# Altium PCB nema17-knockout.PcbDoc (part 2 of 3)
Units mm, origin at the board's own origin, x right, y up, seen from the top; angles counter-clockwise.
Board outline 42.3 x 42.32 mm, 2 copper layers (Top, Bottom), stack 0 mm thick; 130 components, 82 nets, 394 pads, 273 vias.
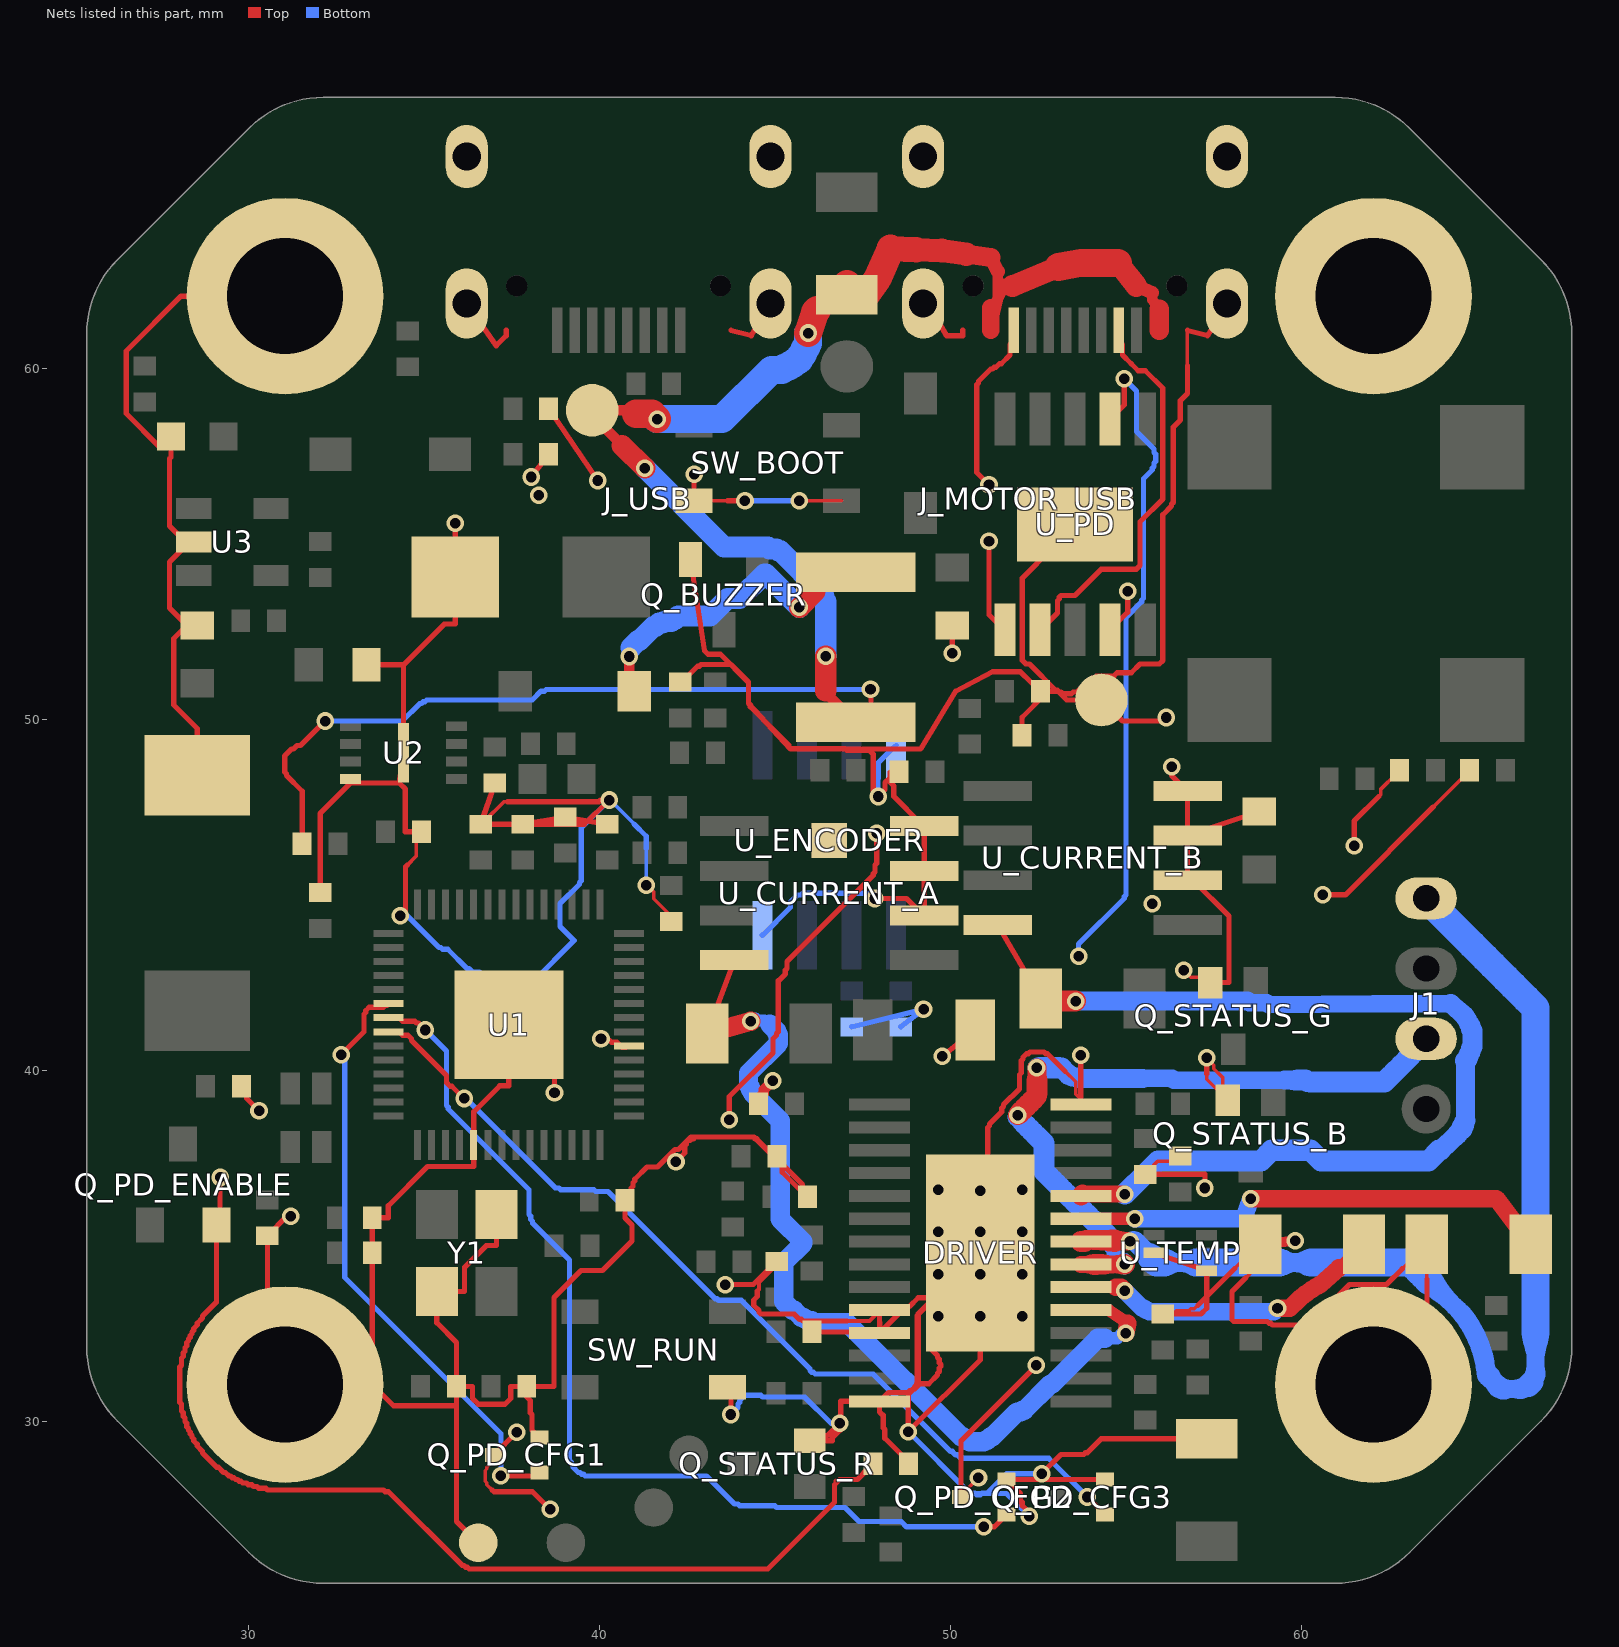
[diagram p2: the nets of this part, all layers, seen from the top]

## Via types
v1: diameter 0.5, hole 0.3, Top to Bottom, 267 vias
v2: diameter 0.45, hole 0.3, Top to Bottom, 6 vias

## Nets (pads, with @x,y where several pads share a name; then routed paths per layer and width w, separated by ;. In a path a pad name is that pad's centre, name@x,y a point inside that pad or via, vN(x,y) a via of type N, cw(c..) or ccw(c..) an arc to the next point about the centre after c; other vN are vias at no path point) (continued)
GND: C_3V3.2 C_ADC.2 C_ADC_A.2 C_ADC_B.2 C_BUZZER.2 C_CORE.2 C_CURRENT_A.2 C_CURRENT_B.2 C_DRV_3V3.2 C_DRV_REF.2 C_DVDD1.2 C_DVDD2.2 C_ENCODER.2 C_ENCODER_BULK.2 C_FLASH.2 C_IOVDD1.2 C_IOVDD2.2 C_IOVDD3.2 C_IOVDD4.2 C_IOVDD5.2 C_IOVDD6.2 C_MOTOR_BULK.2 C_PD_VBUS.2 C_PD_VDD.2 C_TEMP.2 C_USB.2 C_USB_VDD.2 C_VBUS.2 C_VM_BULK.2 C_VM_HF.2 C_VMA.2 C_XIN.2 C_XOUT.2 D_MOTOR_TVS.2 D_PWR.1 DRIVER.14 DRIVER.24 DRIVER.25 DRIVER.28 DRIVER.29 J_MOTOR_USB.1 J_MOTOR_USB.2 J_MOTOR_USB.3 J_MOTOR_USB.4 J_MOTOR_USB.5 J_MOTOR_USB.16 J_USB.13 J_USB.14 J_USB.15 J_USB.16 J_USB.17 J_USB.28 MH1.1 MH2.1 MH3.1 MH4.1 Q_BUZZER.2 Q_PD_CFG1.2 Q_PD_CFG2.2 Q_PD_CFG3.2 Q_STATUS_B.1 Q_STATUS_G.1 Q_STATUS_R.1 R_BUZZER_PD.2 R_CC1.2 R_CC2.2 R_DRV_REF_BOTTOM.2 R_ISEN_A.2 R_ISEN_B.2 R_MCU_ENABLE_PD.2 R_SLEEP_PD.2 SW_BOOT.3 SW_RUN.4 TP_GND.1 TP_PD_GND.1 U1.19 U1.57 U2.4 U2.9 U3.2 U_CURRENT_A.2 U_CURRENT_A.3 U_CURRENT_A.4 U_CURRENT_B.2 U_CURRENT_B.3 U_CURRENT_B.4 U_ENCODER.4 U_ENCODER.8 U_PD.11 U_TEMP.2 U_TEMP.4 Y1.2 Y1.4 | length 555.5
  Top w0.1: v1(41.34,45.28) 41.45,45.2 41.55,45.1 41.55,44.9 42.05,44.4 C_CURRENT_A.2@42.05,44.25 ; SW_BOOT.3@42.7,56.235 43.65,56.235 ; v1@45.85,56.235 46.9,56.235 ; R_BUZZER_PD.2@48.29,48.51 R_BUZZER_PD.2@48.54,48.51 ; DRIVER.29@50.85,34.81 50.966,34.885 DRIVER.29@50.966,35.785 ; U_PD.11@52.9,54.886 53.45,55.436 U_PD.11@53.55,55.56 ; 53.266,39.985 53.566,39.685 53.566,39.335 53.716,39.185 DRIVER.14@53.716,39.035 ; C_VM_HF.2@55.55,37.05 55.65,37.17 55.9,37.42 56.25,37.42 56.4,37.57 C_TEMP.2@56.55,37.57 ; C_VMA.2@56.05,33.07 56.35,33.07 56.45,33.17 56.8,33.17 56.85,33.22 56.95,33.22 57.05,33.32 ; v1(56.65,42.86) 56.85,42.66 57.1,42.66 57.25,42.51 Q_STATUS_G.1@57.4,42.51 ; 56.75,60.086 56.75,61.086 ; 57.3,39.91 57.3,39.76 Q_STATUS_B.1@57.9,39.16 57.9,39.31 57.75,39.46 57.75,39.81 57.5,40.06 57.5,40.16 57.35,40.31 v1(57.3,40.37) ; 58.1,34.37 58.7,34.97 R_ISEN_A.2@58.821,35.06 58.821,34.91 58.671,34.76 58.671,34.36 58.421,34.11 ; MH3.1@62.05,31.06 62.171,31.16 MH3.1@62.721,31.71 ; 62.871,34.36 R_ISEN_B.2@63.571,35.06 63.571,34.06
  Top w0.107: 34.535,45.86 34.785,46.11 34.785,46.51 34.935,46.66 C_IOVDD2.2@34.935,46.81 ; C_DVDD1.2@36.625,47.02 36.735,47.11 37.285,47.66 37.385,47.66 ; 44.5,33.72 44.55,33.77 44.55,33.97 45.05,34.47 R_DRV_REF_BOTTOM.2@45.05,34.57 ; 47.05,32.87 47.7,32.87 47.9,33.07 DRIVER.24@47.984,33.185
  Top w0.15: D_PWR.1@27.801,58.06 27.801,57.473 ; U3.2@28.45,55.06 U3.2@28.278,55.002 ; C_IOVDD3.2@29.81,39.56 29.81,39.41 29.96,39.26 29.96,39.21 v1(30.31,38.86) ; MH2.1@31.05,62.06 28.09,62.06 26.528,60.498 26.528,58.718 27.479,57.767 27.801,57.767 27.801,57.473 ; v1(31.21,35.86) 31.11,35.86 C_IOVDD5.2@30.55,35.3 ; C_IOVDD6.2@32.05,45.07 32.05,47.326 U2.4@32.917,48.193 ; C_3V3.2@33.375,51.56 34.425,51.56 ; v1(34.335,44.41) 34.485,44.56 34.485,45.81 34.535,45.86 ; C_IOVDD2.2@34.935,46.81 34.478,46.81 34.478,48.019 34.304,48.193 ; D_MOTOR_TVS.2@35.9,54.06 35.9,52.723 ; v1(35.9,55.59) 35.9,52.723 ; J_USB.14@36.225,61.854 37.062,60.648 37.35,60.935 37.35,61.086 ; TP_GND.1@36.55,26.56 36.435,26.66 35.935,27.16 C_XIN.2@35.935,31.01 ; C_FLASH.2@37.025,48.2 C_DVDD1.2@36.625,47.02 ; 37.385,47.66 39.985,47.66 40.035,47.71 v1(40.285,47.71) 39.575,47.02 C_DVDD1.2@36.625,47.02 ; v1(38.06,56.91) R_CC1.2@38.56,57.56 ; Q_PD_CFG1.2@38.3,29.56 38.185,29.66 38.085,29.76 38.085,30.21 38.035,30.26 38.035,30.61 37.935,30.71 C_XOUT.2@37.935,31.01 37.478,31.01 ; R_CC2.2@38.56,58.86 v1(39.96,56.81) ; v1(38.725,39.37) 38.725,40.02 37.525,41.22 U1.57@37.425,41.31 37.425,39.573 37.168,39.573 36.425,38.83 U1.19@36.425,37.885 36.425,37.273 35.112,37.273 33.992,36.153 33.992,35.81 C_IOVDD1.2@33.535,35.81 ; C_USB.2@40.225,47.02 C_CORE.2@39.025,47.22 C_USB_VDD.2@37.825,47.02 C_DVDD1.2@36.625,47.02 ; v1(42.185,37.41) 42.435,37.66 42.435,37.86 42.485,37.91 42.485,37.96 42.535,38.01 42.585,38.01 42.635,38.06 42.685,38.06 42.735,38.11 44.385,38.11 44.435,38.06 44.485,38.06 45.785,36.76 45.785,36.71 45.935,36.56 C_ADC.2@45.935,36.41 45.81,36.51 45.21,37.11 45.21,37.26 45.06,37.41 C_DRV_REF.2@45.06,37.56 44.96,37.56 44.41,38.11 42.61,38.11 42.26,37.76 42.16,37.76 41.66,37.26 41.36,37.26 41.01,36.91 41.01,36.86 40.96,36.81 40.96,36.71 40.91,36.66 40.91,36.51 40.81,36.41 C_DVDD2.2@40.735,36.31 40.735,35.803 40.932,35.607 40.932,35.155 40.091,34.314 39.484,34.314 38.713,33.543 38.713,31.01 37.478,31.01 ; C_ADC_A.2@42.3,51.07 42.35,51.07 42.8,51.52 42.85,51.52 42.9,51.57 43.75,51.57 44.25,51.07 44.25,50.47 44.3,50.42 44.3,50.37 45.4,49.27 45.4,49.22 45.45,49.17 47,49.17 47.05,49.12 47.7,49.12 47.8,49.02 47.8,47.97 v1(47.94,47.81) 48.14,48.01 48.14,48.21 48.29,48.36 48.29,48.51 48.29,48.21 48.39,48.11 48.39,47.81 49.14,47.06 U_CURRENT_A.4@49.255,46.965 U_CURRENT_A.3@49.255,45.695 U_CURRENT_A.2@49.255,44.425 49.145,44.505 48.745,44.905 v1(47.845,44.905) ; Q_BUZZER.2@42.6,54.56 43,51.96 43.1,51.86 43.45,51.86 44.25,51.06 44.25,50.46 45.45,49.16 49.15,49.16 50.15,50.81 51.2,51.36 52,51.36 C_ADC_B.2@52.56,50.81 ; SW_BOOT.3@42.7,56.235 v1(42.7,56.985) ; v1(43.585,33.91) 44.385,33.91 44.935,34.46 R_DRV_REF_BOTTOM.2@45.05,34.57 ; SW_RUN.4@43.65,30.985 43.75,30.91 v1(43.75,30.21) ; 43.65,56.235 v1(44.15,56.235) ; 43.75,61.086 44.325,60.935 J_USB.13@44.875,61.854 ; 44.5,33.72 44.5,33.57 44.4,33.47 44.4,33.32 44.55,33.17 44.55,33.12 44.6,33.07 45.55,33.07 45.7,32.92 45.75,32.92 45.8,32.87 47.05,32.87 ; v1(45.7,56.235) v1@45.85,56.235 ; R_SLEEP_PD.2@46.06,32.56 47.91,32.56 DRIVER.25@47.984,32.535 ; v1(46.85,29.96) 46.5,29.61 46.3,29.61 46.15,29.46 Q_STATUS_R.1@46,29.46 46.637,29.46 46.637,29.539 46.874,29.777 46.874,30.585 DRIVER.28@47.984,30.585 ; DRIVER.24@47.984,33.185 DRIVER.25@47.985,32.535 ; R_MCU_ENABLE_PD.2@48.81,28.81 48.734,28.935 48.134,29.535 48.134,29.785 48.084,29.835 48.084,30.185 47.984,30.285 DRIVER.28@47.984,30.585 ; J_MOTOR_USB.2@49.225,61.854 49.338,61.885 49.888,60.935 50.35,60.935 50.35,61.086 ; v1(49.762,40.41) C_PD_VBUS.2@50.712,41.16 ; v1(50.05,51.885) C_PD_VDD.2@50.05,52.685 ; DRIVER.29@50.966,35.785 50.966,37.035 51.066,37.135 51.066,38.385 51.116,38.435 51.116,38.485 51.466,38.835 51.466,38.935 51.516,38.985 51.516,39.035 51.966,39.485 51.966,39.885 52.016,39.935 52.016,40.285 52.066,40.335 52.066,40.385 52.166,40.485 52.216,40.485 52.266,40.535 52.666,40.535 52.716,40.485 52.766,40.485 53.266,39.985 ; C_CURRENT_B.2@52.04,49.56 52.04,50.067 52.045,50.067 52.674,50.696 C_ADC_B.2@52.56,50.81 ; v1(52.25,27.31) 52.25,27.41 52.05,27.61 52.05,27.71 52,27.71 52,27.96 51.7,28.26 Q_PD_CFG2.2@51.6,28.36 Q_PD_CFG3.2@54.4,28.36 ; v1(52.6,28.523) 53.15,29.073 53.8,29.073 53.85,29.123 53.9,29.123 54.3,29.523 C_VM_BULK.2@57.3,29.523 ; U_PD.11@52.9,54.886 52.05,54.036 52.05,51.686 52.15,51.586 52.25,51.586 53,50.836 53.05,50.836 53.1,50.786 53.15,50.786 53.2,50.736 53.45,50.736 53.5,50.786 53.6,50.786 53.95,51.136 54,51.136 54.05,51.186 54.1,51.186 54.15,51.236 54.65,51.236 54.75,51.336 55.15,51.336 55.4,51.586 55.95,51.586 56.05,51.686 56.05,55.836 56.3,56.086 56.3,56.136 56.35,56.186 56.35,58.336 56.55,58.536 56.55,59.086 56.75,59.286 56.75,60.086 ; DRIVER.14@53.716,39.035 v1(53.716,40.435) ; C_VM_HF.2@55.55,37.05 57.25,37.05 v1(57.25,36.66) ; C_VMA.2@56.05,33.07 57.132,33.07 57.3,33.238 U_TEMP.4@57.3,34.31 ; v1(56.15,50.06) 56.05,49.96 54.9,49.96 TP_PD_GND.1@54.3,50.56 53.313,50.56 53.063,50.81 C_ADC_B.2@52.56,50.81 ; v1(56.3,48.66) 56.3,48.41 56.65,48.06 U_CURRENT_B.4@56.755,47.965 U_CURRENT_B.3@56.755,46.695 ; 56.75,61.086 57.325,60.935 J_MOTOR_USB.1@57.875,61.854 ; 57.05,33.32 58.1,34.37 ; 57.3,39.91 57.3,40.31 v1(57.3,40.37) ; Q_STATUS_G.1@57.4,42.51 57.937,42.51 57.937,44.402 56.914,45.425 U_CURRENT_B.2@56.755,45.425 U_CURRENT_B.3@56.755,46.695 ; 58.421,34.11 58.021,33.71 58.021,32.91 58.071,32.86 59.021,32.86 59.071,32.81 59.121,32.81 59.171,32.76 60.221,32.76 61.371,33.91 62.421,33.91 62.871,34.36 ; C_BUZZER.2@58.8,47.385 U_CURRENT_B.3@56.755,46.695 ; MH3.1@62.721,31.71 63.571,32.56 63.571,34.06 ; 27.763,53.179 C_VBUS.2@28.257,52.685 ; 27.763,53.179 27.763,54.488 ; 27.763,53.179 27.763,54.488 ; 27.763,53.179 C_VBUS.2@28.257,52.685 ; 27.763,53.179 C_VBUS.2@28.257,52.685 ; 27.763,53.179 27.763,54.488 ; 27.763,54.488 U3.2@28.278,55.002 ; 27.763,54.488 U3.2@28.278,55.002 ; 27.763,54.488 U3.2@28.278,55.002 ; 27.763,55.517 27.763,57.436 ; 27.763,55.517 U3.2@28.278,55.002 ; 27.763,55.517 U3.2@28.278,55.002 ; 27.763,55.517 27.763,57.436 ; 27.763,57.436 27.801,57.473 ; 27.763,57.436 27.801,57.473 ; 27.883,50.416 27.883,52.312 ; 27.883,50.416 28.55,49.749 ; 27.883,50.416 27.883,52.312 ; 27.883,50.416 28.55,49.749 ; 27.883,52.312 C_VBUS.2@28.257,52.685 ; 27.883,52.312 C_VBUS.2@28.257,52.685 ; C_VBUS.2@28.257,52.685 C_VBUS.2@28.55,52.685 ; C_VBUS.2@28.257,52.685 C_VBUS.2@28.55,52.685 ; C_VBUS.2@28.257,52.685 C_VBUS.2@28.55,52.685 ; 28.55,49.749 C_MOTOR_BULK.2@28.55,48.412 28.55,49.749 ; MH1.1@30.55,31.56 C_IOVDD5.2@30.55,35.3 ; MH1.1@30.55,31.56 MH1.1@31.05,31.06 ; MH1.1@30.55,31.56 C_IOVDD5.2@30.55,35.3 ; MH1.1@30.55,31.56 MH1.1@31.05,31.06 ; MH1.1@31.05,31.06 MH1.1@33.535,31.06 ; U2.4@32.918,48.193 34.304,48.193 ; U2.4@32.918,48.193 U2.4@32.918,48.31 ; U2.4@32.917,48.193 U2.4@32.918,48.31 ; U2.4@32.918,48.193 U2.4@32.918,48.31 ; U2.4@32.918,48.193 34.304,48.193 ; MH1.1@33.535,31.06 34.137,30.458 ; MH1.1@33.535,31.06 C_IOVDD1.2@33.535,35.81 ; MH1.1@33.535,31.06 34.137,30.458 ; MH1.1@33.535,31.06 C_IOVDD4.2@33.535,34.81 ; MH1.1@33.535,31.06 C_IOVDD4.2@33.535,34.81 ; C_IOVDD4.2@33.535,34.81 C_IOVDD1.2@33.535,35.81 ; 34.137,30.458 35.935,30.458 ; 34.137,30.458 35.935,30.458 ; 34.304,48.193 U2.9@34.425,49.06 ; 34.304,48.193 U2.9@34.425,49.06 ; 34.304,48.193 U2.9@34.425,49.06 ; U2.9@34.425,49.06 34.425,51.56 ; U2.9@34.425,49.06 34.425,51.56 ; U2.9@34.425,49.06 34.425,51.56 ; 34.425,51.56 35.588,52.723 ; 34.425,51.56 35.588,52.723 ; 35.375,32.823 Y1.2@35.375,33.71 ; 35.375,32.823 35.935,32.263 ; 35.375,32.823 Y1.2@35.375,33.71 ; 35.375,32.823 35.935,32.263 ; 35.375,32.823 Y1.2@35.375,33.71 ; 35.375,32.823 35.935,32.263 ; 35.375,32.823 Y1.2@35.375,33.71 ; 35.375,32.823 35.935,32.263 ; Y1.2@35.375,33.71 36.162,33.71 ; Y1.2@35.375,33.71 36.162,33.71 ; Y1.2@35.375,33.71 36.162,33.71 ; 35.588,52.723 35.9,52.723 ; 35.588,52.723 35.9,52.723 ; 35.935,30.458 35.935,32.263 ; 35.935,30.458 35.935,32.263 ; C_XIN.2@35.935,31.01 36.392,31.01 ; C_XIN.2@35.935,31.01 35.935,32.263 ; C_XIN.2@35.935,31.01 35.935,32.263 ; C_XIN.2@35.935,31.01 36.392,31.01 ; 36.162,33.71 36.162,34.4 ; 36.162,33.71 36.162,34.4 ; 36.162,33.71 36.162,34.4 ; 36.162,34.4 36.785,35.023 ; 36.162,34.4 36.785,35.023 ; 36.162,34.4 36.785,35.023 ; 36.392,30.668 36.392,31.01 ; 36.392,30.668 36.556,30.503 ; 36.392,30.668 36.392,31.01 ; 36.392,30.668 36.556,30.503 ; 36.556,30.503 37.314,30.503 ; 36.556,30.503 37.314,30.503 ; 36.785,35.023 37.075,35.023 ; 36.785,35.023 37.075,35.023 ; 36.785,35.023 37.075,35.023 ; 37.075,35.023 Y1.4@37.075,35.91 ; 37.075,35.023 Y1.4@37.075,35.91 ; 37.075,35.023 Y1.4@37.075,35.91 ; 37.314,30.503 37.478,30.668 ; 37.314,30.503 37.478,30.668 ; 37.478,30.668 37.478,31.01 ; 37.478,30.668 37.478,31.01 ; DRIVER.28@47.984,30.585 48.235,30.835 ; DRIVER.28@47.984,30.585 48.234,30.835 ; DRIVER.25@47.984,32.535 48.735,33.285 48.835,33.285 49.085,33.535 49.335,33.535 49.385,33.485 49.385,32.135 49.635,31.885 49.635,31.835 49.685,31.785 49.685,31.685 49.735,31.635 49.735,31.585 49.685,31.535 49.685,31.435 49.635,31.385 49.635,31.335 49.385,31.085 49.135,31.085 48.985,30.935 48.935,30.935 ; 48.235,30.835 48.785,30.835 ; 48.234,30.835 48.784,30.835 ; 48.785,30.835 48.835,30.885 48.885,30.885 ; 48.784,30.835 48.834,30.885 48.884,30.885 ; 48.885,30.885 48.935,30.935 ; 48.884,30.885 48.934,30.935 ; 48.934,30.935 48.984,30.935 48.984,30.985 49.034,31.035 49.034,31.085 49.084,31.135 49.084,33.085 50.734,34.735 DRIVER.29@50.85,34.81 ; DRIVER.29@50.85,34.81 50.75,34.723 49.05,33.023 49.05,31.073 49,31.023 49,30.973 48.8,30.773 v1(48.8,29.723) 50.85,31.76 DRIVER.29@50.85,34.81 ; U_TEMP.4@57.3,34.31 U_TEMP.2@55.8,34.81 57.142,34.363 U_TEMP.4@57.3,34.31
  Top w0.3: C_DRV_3V3.2@44.54,39.06 44.54,39.21 44.69,39.36 44.69,39.46 v1(44.94,39.71) ; R_ISEN_A.2@58.821,35.06 v1(59.821,35.16)
  Mid1 w0.1: v1(56.65,42.86) 56.65,42.31 57.3,41.66 57.3,41.51
  Mid1 w0.15: v1(35.9,55.59) 37.278,55.59 v1(38.275,56.385) ; v1(42.185,37.41) 43.585,36.01 v1(43.585,33.91) ; v1(56.15,50.06) 56.15,49.96 56.3,49.81 v1(56.3,48.66) ; v1(57.3,40.37) 57.3,40.41 57.3,41.51 ; J_MOTOR_USB.1@57.875,61.854 58.45,62.46 MH4.1@62.05,62.06 ; 35.65,62.46 J_USB.14@36.225,61.854 ; 35.65,62.46 MH2.1@31.05,62.06 35.65,62.46 ; 35.65,62.46 J_USB.14@36.508,61.602 ; J_USB.14@36.225,61.854 J_USB.14@36.508,61.602 ; J_USB.14@36.225,61.854 J_USB.14@36.508,61.602 ; J_USB.14@36.225,61.854 J_USB.14@36.508,61.602 ; J_USB.14@36.508,61.602 J_USB.13@44.592,61.602 ; J_USB.14@36.508,61.602 J_USB.13@44.592,61.602 ; J_USB.14@36.508,61.602 J_USB.13@44.592,61.602 ; J_USB.14@36.508,61.602 J_USB.13@44.592,61.602 ; J_USB.13@44.592,61.602 J_USB.13@44.875,61.854 ; J_USB.13@44.592,61.602 J_USB.13@44.875,61.854 ; J_USB.13@44.592,61.602 J_USB.13@44.875,61.854 ; J_USB.13@44.592,61.602 J_USB.13@44.875,61.854 ; J_USB.15@44.875,66.034 J_MOTOR_USB.4@49.225,66.034 ; J_USB.15@44.875,66.034 J_MOTOR_USB.4@49.225,66.034 ; J_USB.15@44.875,66.034 J_MOTOR_USB.4@49.225,66.034 ; J_USB.15@44.875,66.034 J_MOTOR_USB.4@49.225,66.034 ; J_USB.15@44.875,66.034 J_MOTOR_USB.4@49.225,66.034 ; J_USB.15@44.875,66.034 J_MOTOR_USB.4@49.225,66.034 ; J_USB.15@44.875,66.034 J_MOTOR_USB.4@49.225,66.034
  Mid2 w0.15: v1(30.31,38.86) 30.31,38.61 31.21,37.71 v1(31.21,35.86) ; J_USB.16@36.225,66.034 J_USB.14@36.225,61.854 36.225,59.207 v1(38.275,56.385) ; v1(38.725,39.37) 38.925,39.57 38.925,44.07 38.975,44.12 38.975,44.17 40.025,45.22 40.025,45.42 40.075,45.47 40.075,45.57 40.275,45.77 v1(40.285,47.71) ; J_MOTOR_USB.1@57.875,61.854 J_MOTOR_USB.3@57.875,66.034 ; J_USB.13@44.875,61.854 J_USB.15@44.875,66.034 ; J_USB.13@44.875,61.854 J_USB.15@44.875,66.034 ; J_USB.13@44.875,61.854 J_USB.15@44.875,66.034 ; J_USB.13@44.875,61.854 J_USB.15@44.875,66.034 ; J_USB.13@44.875,61.854 J_USB.15@44.875,66.034 ; J_USB.13@44.875,61.854 J_USB.15@44.875,66.034 ; J_MOTOR_USB.2@49.225,61.854 J_MOTOR_USB.4@49.225,66.034 ; J_MOTOR_USB.2@49.225,61.854 J_MOTOR_USB.4@49.225,66.034 ; J_MOTOR_USB.2@49.225,61.854 J_MOTOR_USB.4@49.225,66.034 ; J_MOTOR_USB.2@49.225,61.854 J_MOTOR_USB.4@49.225,66.034 ; J_MOTOR_USB.2@49.225,61.854 J_MOTOR_USB.4@49.225,66.034 ; J_MOTOR_USB.2@49.225,61.854 J_MOTOR_USB.4@49.225,66.034
  Bottom w0.1: v1(40.285,47.71) 40.39,47.63 40.99,47.03 ; v1(41.34,45.28) 41.34,46.33
  Bottom w0.15: v1(34.335,44.41) 34.535,44.41 35.435,43.51 35.485,43.51 35.535,43.46 35.685,43.46 36.235,42.91 36.285,42.91 36.385,42.81 36.585,42.81 36.785,42.61 36.835,42.61 36.885,42.56 36.985,42.56 37.035,42.51 38.035,42.51 38.085,42.56 38.135,42.56 39.285,43.71 38.885,44.11 38.885,44.76 39.435,45.31 39.435,45.36 39.485,45.41 39.485,46.91 v1(40.285,47.71) ; 40.99,47.03 41.34,46.68 41.34,46.33 ; v1(43.75,30.21) 43.95,30.41 43.95,30.51 44,30.56 44,30.61 44.15,30.76 44.6,30.76 44.65,30.71 45.85,30.71 46.6,29.96 v1(46.85,29.96) ; v1(44.15,56.235) v1(45.7,56.235) ; U_ENCODER.4@44.645,43.855 45.445,44.655 45.445,44.805 45.645,45.005 45.745,45.005 45.795,45.055 47.695,45.055 v1(47.845,44.905) ; C_ENCODER.2@47.185,41.25 v1(49.235,41.75) C_ENCODER_BULK.2@48.585,41.25 ; v1(52.25,27.31) 51.6,27.96 50.6,27.96 50.55,28.01 50.5,28.01 v1(48.8,29.723) 50.55,27.973 50.7,27.973 50.75,27.923 50.85,27.923 50.9,27.973 51.05,27.973 51.6,28.523 v1(52.6,28.523) ; v1(47.94,47.81) 47.94,48.76 48.34,49.16 U_ENCODER.8@48.455,49.265 48.35,49.17 47.95,48.77 v1(47.94,47.81)
  other v1: 49.65,33.01 50.85,33.01 52.05,33.01 49.65,34.21 50.85,34.21 52.05,34.21 49.65,35.41 50.85,35.41 52.05,35.41 50.85,36.588 49.65,36.61 52.05,36.61
ISEN_A: DRIVER.6 R_ISEN_A.1 | length 9.1
  Top w0.3: DRIVER.6@53.716,33.835 54.716,33.835 ; 61.066,34.385 61.666,34.985 R_ISEN_A.1@61.779,35.06
  Top w0.5: 54.716,33.835 54.866,33.835 v1(54.966,33.735) ; v1(59.316,33.235) 59.664,33.237 59.916,33.485 59.945,33.51 60.11,33.643 60.143,33.667 60.258,33.747 60.293,33.77 60.411,33.843 60.449,33.865 60.508,33.898 60.548,33.919 61.066,34.385
  Bottom w0.5: v1(54.966,33.735) 55.466,33.235 55.516,33.235 55.566,33.185 55.616,33.185 55.666,33.135 59.216,33.135 v1(59.316,33.235)
ISEN_B: DRIVER.9 R_ISEN_B.1 | length 13.9
  Top w0.35: DRIVER.9@53.716,35.785 v1(55.25,35.785)
  Top w0.5: v1(58.55,36.36) 65.55,36.36 R_ISEN_B.1@66.529,35.06
  Bottom w0.5: v1(55.25,35.785) 58.35,35.785 v1(58.55,36.36)
MCU_ENABLE: Q_PD_ENABLE.2 R_MCU_ENABLE_PD.1 U1.34 | length 44.9
  Top w0.15: v1(29.2,36.96) 29.2,35.76 29.15,35.71 29.15,35.66 Q_PD_ENABLE.2@29.1,35.61 29.1,33.41 28.7,33.01 28.7,32.96 28.55,32.81 28.55,32.76 28.45,32.66 28.45,32.61 28.4,32.56 28.4,32.51 28.35,32.46 28.35,32.41 28.3,32.36 28.3,32.31 28.25,32.26 28.25,32.16 28.2,32.11 28.2,32.01 28.15,31.96 28.15,31.86 28.1,31.81 28.1,31.61 28.05,31.56 28.05,30.56 28.1,30.51 28.1,30.31 28.15,30.26 28.15,30.16 28.2,30.11 28.2,30.01 28.25,29.96 28.25,29.86 28.3,29.81 28.3,29.76 28.35,29.71 28.35,29.66 28.4,29.61 28.4,29.56 28.45,29.51 28.45,29.46 28.55,29.36 28.55,29.31 28.7,29.16 28.7,29.11 29.1,28.71 29.15,28.71 29.3,28.56 29.35,28.56 29.45,28.46 29.5,28.46 29.55,28.41 29.6,28.41 29.65,28.36 29.7,28.36 29.75,28.31 29.8,28.31 29.85,28.26 29.95,28.26 30,28.21 30.1,28.21 30.15,28.16 30.25,28.16 30.3,28.11 30.5,28.11 30.55,28.06 33.85,28.06 33.9,28.01 34,28.01 36.1,25.91 36.15,25.91 36.2,25.86 36.25,25.86 36.3,25.81 44.8,25.81 46.7,27.71 46.7,28.21 46.75,28.26 46.75,28.31 46.8,28.31 46.85,28.36 47.35,28.36 47.7,28.71 R_MCU_ENABLE_PD.1@47.79,28.81 ; v1(40.05,40.91) 40.2,40.91 40.25,40.86 40.3,40.86 40.35,40.81 40.5,40.81 40.65,40.66 40.75,40.66 U1.34@40.85,40.71
  Mid1 w0.15: v1(29.2,36.96) 29.35,37.11 29.85,37.61 29.85,39.01 29.95,39.11 29.95,39.16 30.05,39.26 30.1,39.26 30.15,39.31 35.6,39.31 35.9,39.61 35.95,39.61 36,39.66 36.4,39.66 36.55,39.81 37.55,39.81 37.6,39.86 38.1,39.86 38.25,40.01 38.3,40.01 38.35,40.06 38.4,40.06 38.45,40.11 39.1,40.11 39.4,40.41 39.8,40.81 39.9,40.81 39.95,40.86 40,40.86 v1(40.05,40.91)
MOTOR_A_MINUS: DRIVER.7 J1.2 | length 20.1
  Top w0.485: DRIVER.7@53.716,34.485 53.791,34.485 DRIVER.7@53.866,34.485
  Top w0.49: DRIVER.7@53.866,34.485 DRIVER.7@53.941,34.485
  Top w0.505: 54.616,34.485 54.691,34.485 v1@54.766,34.485
  Top w0.51: DRIVER.7@53.941,34.485 DRIVER.7@54.016,34.485 ; DRIVER.7@54.541,34.485 54.616,34.485
  Top w0.515: DRIVER.7@54.466,34.485 DRIVER.7@54.541,34.485
  Top w0.52: v1@54.766,34.485 v1@54.841,34.485
  Top w0.535: v1@52.466,40.012 v1(52.466,40.085)
  Top w0.54: v1@52.466,39.867 52.466,39.94 v1@52.466,40.012 ; DRIVER.7@54.391,34.485 DRIVER.7@54.466,34.485
  Top w0.545: v1@54.841,34.485 v1@54.916,34.485
  Top w0.55: 52.466,39.794 v1@52.466,39.867 ; DRIVER.7@54.016,34.485 DRIVER.7@54.091,34.485
  Top w0.56: v1(51.916,38.735) v1@51.966,38.785
  Top w0.565: 52.416,39.235 52.466,39.285 52.466,39.358 ; DRIVER.7@54.316,34.485 DRIVER.7@54.391,34.485
  Top w0.58: 52.466,39.722 52.466,39.794 ; DRIVER.7@54.241,34.485 DRIVER.7@54.316,34.485
  Top w0.59: DRIVER.7@54.166,34.485 DRIVER.7@54.241,34.485 ; v1@54.916,34.485 v1(54.965,34.485)
  Top w0.6: v1@51.966,38.785 52.016,38.835 52.066,38.885 52.116,38.935 52.166,38.985 52.216,39.035 52.266,39.085 52.316,39.135 52.366,39.185 52.416,39.235 ; 52.466,39.358 52.466,39.431 52.466,39.503 52.466,39.576 52.466,39.649 52.466,39.722 ; DRIVER.7@54.091,34.485 DRIVER.7@54.166,34.485
  Bottom w0.37: 54.566,34.985 54.616,34.935 54.616,34.885
  Bottom w0.38: 54.616,34.885 54.666,34.835 54.666,34.785
  Bottom w0.39: 54.566,35.048 54.566,35.11 54.566,35.173 54.566,35.235
  Bottom w0.405: 54.514,35.287 54.566,35.235 ; 54.566,34.985 54.566,35.048
  Bottom w0.435: 54.666,34.785 54.716,34.735 54.766,34.685
  Bottom w0.445: 54.766,34.685 v1@54.816,34.635
  Bottom w0.47: v1@54.816,34.635 v1@54.866,34.585
  Bottom w0.5: 55.491,39.785 55.566,39.785 55.641,39.785 55.716,39.785 55.791,39.785 55.866,39.785 55.941,39.785 56.016,39.785 56.091,39.785 56.166,39.785 56.241,39.785 56.316,39.785 56.366,39.735 56.441,39.735 56.516,39.735 56.591,39.735 56.666,39.735 56.741,39.735 56.816,39.735 56.891,39.735 56.966,39.735 57.041,39.735 57.116,39.735 57.191,39.735 57.266,39.735 57.341,39.735 57.416,39.735 57.491,39.735 57.566,39.735 57.641,39.735 57.716,39.735 57.791,39.735 57.866,39.735 57.941,39.735 58.016,39.735 58.091,39.735 58.166,39.735 58.241,39.735 58.316,39.735 58.391,39.735 58.466,39.735 58.541,39.735 58.616,39.735 58.691,39.735 58.766,39.735 58.841,39.735 58.916,39.735 58.991,39.735 59.066,39.735 59.141,39.735 59.216,39.735 59.291,39.735 59.366,39.735 59.441,39.735 59.516,39.735
  Bottom w0.515: v1@51.916,38.685 v1(51.916,38.735) ; v1@54.866,34.585 v1@54.916,34.535
  Bottom w0.525: 53.516,39.835 53.566,39.835 53.616,39.785 ; 54.462,35.339 54.514,35.287
  Bottom w0.535: 59.591,39.735 59.666,39.735
  Bottom w0.54: 53.366,39.885 53.416,39.885 53.466,39.835 ; 53.616,39.785 53.691,39.785 53.766,39.785 53.841,39.785 53.916,39.785 53.991,39.785 54.066,39.785 54.141,39.785 54.216,39.785 54.291,39.785 54.366,39.785 54.441,39.785 54.516,39.785 54.591,39.785 54.666,39.785 54.741,39.785 54.816,39.785 54.891,39.785 54.966,39.785 55.041,39.785 55.116,39.785 55.191,39.785 55.266,39.785 55.341,39.785 55.416,39.785 55.491,39.785 ; 59.516,39.735 59.591,39.735 ; 59.666,39.735 59.741,39.735
  Bottom w0.55: v1(52.466,40.085) v1@52.536,40.085
  Bottom w0.555: 53.466,39.835 53.516,39.835 ; 59.741,39.735 59.816,39.735
  Bottom w0.56: 53.216,40.035 53.266,39.985 53.316,39.935
  Bottom w0.57: v1@51.916,38.685 51.966,38.635 v1@52.016,38.585 ; 53.166,40.085 53.216,40.035 ; 53.316,39.935 53.366,39.885 ; v1@54.916,34.535 v1(54.965,34.485)
  Bottom w0.575: v1@52.016,38.585 52.066,38.535
  Bottom w0.585: 59.816,39.735 59.891,39.735
  Bottom w0.59: 53.096,40.085 53.166,40.085 ; 60.116,39.735 60.166,39.685 60.24,39.685
  Bottom w0.6: 52.066,38.535 52.116,38.485 52.166,38.435 52.216,38.385 52.266,38.335 52.316,38.285 52.366,38.235 52.416,38.185 52.466,38.135 52.516,38.085 52.566,38.035 52.616,37.985 52.666,37.935 52.666,37.862 52.666,37.79 52.666,37.717 52.666,37.644 52.666,37.572 52.666,37.499 52.666,37.426 52.666,37.353 52.666,37.281 52.666,37.208 52.666,37.135 52.716,37.085 52.766,37.035 52.816,36.985 52.866,36.935 52.916,36.885 52.966,36.835 53.016,36.785 53.066,36.735 53.116,36.685 53.166,36.635 53.216,36.585 53.266,36.535 53.316,36.485 53.368,36.433 53.42,36.381 53.472,36.329 53.524,36.277 53.576,36.225 53.628,36.173 53.68,36.121 53.732,36.068 53.785,36.016 53.837,35.964 53.889,35.912 53.941,35.86 53.993,35.808 54.045,35.756 54.097,35.704 54.149,35.652 54.201,35.6 54.253,35.548 54.305,35.496 54.357,35.443 54.41,35.391 54.462,35.339 ; v1@52.536,40.085 52.606,40.085 52.676,40.085 52.746,40.085 52.816,40.085 52.886,40.085 52.956,40.085 53.026,40.085 53.096,40.085 ; 59.891,39.735 59.966,39.735 60.041,39.735 60.116,39.735 ; 60.24,39.685 60.314,39.685 60.388,39.685 60.462,39.685 60.536,39.685 60.61,39.685 60.684,39.685 60.758,39.685 60.832,39.685 60.906,39.685 60.98,39.685 61.054,39.685 61.128,39.685 61.202,39.685 61.276,39.685 61.35,39.685 61.424,39.685 61.498,39.685 61.572,39.685 61.646,39.685 61.72,39.685 61.794,39.685 61.868,39.685 61.942,39.685 62.016,39.685 62.086,39.685 62.156,39.685 62.226,39.685 62.296,39.685 62.366,39.685 62.418,39.738 62.471,39.79 62.523,39.842 62.575,39.895 62.628,39.947 62.68,39.999 62.732,40.052 62.785,40.104 62.837,40.157 62.89,40.209 62.942,40.261 62.994,40.314 63.047,40.366 63.099,40.418 63.151,40.471 63.204,40.523 63.256,40.576 63.309,40.628 63.361,40.68 63.413,40.733 63.466,40.785 63.494,40.827 63.522,40.868 J1.2@63.55,40.91
MOTOR_A_PLUS: DRIVER.5 R_PHASE_A.1 U_CURRENT_A.8 | length 27.8
  Top w0.15: R_PHASE_A.1@43.071,41.06 U_CURRENT_A.8@43.845,43.155
  Top w0.35: DRIVER.5@53.716,33.185 54.507,33.185 55.054,32.81
  Top w0.5: v1(54.998,32.529) 55.054,32.81
  Top w0.55: R_PHASE_A.1@43.071,41.06 v1(44.31,41.408)
  Bottom w0.35: v1(44.31,41.408) 44.401,41.479 44.451,41.479 44.501,41.429 44.701,41.429 44.751,41.379 44.801,41.379 44.851,41.329 ; 54.401,32.379 54.751,32.379 54.901,32.529 v1(54.998,32.529)
  Bottom w0.55: 44.851,41.329 45.051,41.129 45.051,41.079 45.101,41.029 45.101,40.779 44.251,39.929 44.251,39.579 44.301,39.529 44.301,39.479 44.351,39.429 44.351,39.379 45.151,38.579 45.151,35.779 45.801,35.129 45.801,35.079 45.251,34.529 45.251,33.429 45.501,33.179 45.551,33.179 45.751,32.979 45.801,32.979 45.851,32.929 45.901,32.929 45.951,32.879 46.051,32.879 46.101,32.829 47.051,32.829 50.301,29.579 50.351,29.579 50.451,29.479 50.501,29.479 50.551,29.429 50.951,29.429 51.001,29.479 51.051,29.479 51.151,29.579 51.201,29.579 51.901,30.279 52.001,30.279 52.051,30.329 52.101,30.329 52.851,31.079 52.901,31.079 54.201,32.379 54.401,32.379
MOTOR_B_MINUS: DRIVER.8 J1.4 | length 30.3
  Top w0.455: v1@55.042,35.147 v1(55.116,35.145)
  Top w0.525: v1@54.895,35.152 54.969,35.15 v1@55.042,35.147
  Top w0.535: 54.822,35.154 v1@54.895,35.152
  Top w0.545: DRIVER.8@53.816,35.135 53.866,35.185 DRIVER.8@53.939,35.183
  Top w0.55: DRIVER.8@53.939,35.183 DRIVER.8@54.013,35.18 ; 54.748,35.157 54.822,35.154
  Top w0.555: DRIVER.8@54.013,35.18 DRIVER.8@54.086,35.178
  Top w0.56: DRIVER.8@54.086,35.178 DRIVER.8@54.16,35.176
  Top w0.565: DRIVER.8@54.16,35.176 DRIVER.8@54.233,35.173
  Top w0.57: DRIVER.8@54.233,35.173 DRIVER.8@54.307,35.171
  Top w0.575: DRIVER.8@54.307,35.171 DRIVER.8@54.38,35.169
  Top w0.58: DRIVER.8@54.38,35.169 DRIVER.8@54.454,35.166
  Top w0.585: DRIVER.8@54.454,35.166 DRIVER.8@54.528,35.164 ; 54.675,35.159 54.748,35.157
  Top w0.6: DRIVER.8@53.716,35.135 53.766,35.135 DRIVER.8@53.816,35.135
  Top w0.61: DRIVER.8@54.528,35.164 54.601,35.162
  Top w0.63: 54.601,35.162 54.675,35.159
  Bottom w0.49: v1@55.166,35.165 55.216,35.185 v1@55.266,35.135
  Bottom w0.5: v1(55.116,35.145) v1@55.166,35.165
  Bottom w0.51: 64.255,33.396 64.307,33.344 64.359,33.292
  Bottom w0.515: 56.538,34.535 56.613,34.535 ; 64.359,33.292 64.411,33.241 ; 65.922,30.935 65.991,30.935 66.059,30.935
  Bottom w0.52: 56.464,34.535 56.538,34.535 ; 64.204,33.448 64.255,33.396 ; 64.411,33.241 64.462,33.189 ; 66.666,31.484 66.666,31.559 66.666,31.634 66.666,31.708 66.666,31.783 66.666,31.858 66.666,31.932
  Bottom w0.525: 56.613,34.535 56.688,34.535 ; 64.152,33.5 64.204,33.448 ; 65.853,30.935 65.922,30.935 ; 66.059,30.935 66.128,30.935
  Bottom w0.53: 56.389,34.535 56.464,34.535 ; 64.1,33.551 64.152,33.5 ; 64.462,33.189 64.514,33.137 ; 66.666,31.932 66.666,32.007
  Bottom w0.535: 59.752,34.535 59.827,34.535 59.902,34.535 ; 64.514,33.137 64.566,33.085
  Bottom w0.54: 64.048,33.603 64.1,33.551 ; 66.128,30.935 66.197,30.935 ; 66.666,31.41 66.666,31.484
  Bottom w0.545: 59.678,34.535 59.752,34.535 ; 64.89,32.598 64.922,32.538 ; 65.009,32.354 65.035,32.293 ; 65.128,32.039 65.149,31.969 65.169,31.899 ; 65.217,31.695 65.228,31.637
  Bottom w0.55: 56.688,34.535 56.763,34.535 ; 59.902,34.535 59.977,34.535 ; 64.566,33.085 64.591,33.055 64.632,32.998 64.674,32.942 64.716,32.885 64.738,32.85 64.776,32.792 64.799,32.756 ; 64.834,32.696 64.869,32.637 64.89,32.598 ; 64.922,32.538 64.942,32.498 ; 64.99,32.396 65.009,32.354 ; 65.035,32.293 65.053,32.25 65.076,32.189 ; 65.108,32.1 65.128,32.039 ; 65.184,31.84 65.201,31.768 65.217,31.695 ; 65.228,31.637 65.237,31.576 65.246,31.514 65.254,31.452 65.263,31.39 65.307,31.339 ; 65.785,30.935 65.853,30.935
  Bottom w0.555: 64.799,32.756 64.834,32.696 ; 64.942,32.498 64.971,32.438 64.99,32.396 ; 65.076,32.189 65.092,32.144 65.108,32.1 ; 65.169,31.899 65.184,31.84 ; 66.666,32.007 66.666,32.082
  Bottom w0.56: 55.366,35.035 55.416,34.985 55.466,34.935 ; 56.314,34.535 56.389,34.535 ; 63.996,33.655 64.048,33.603
  Bottom w0.565: v1@55.316,35.085 55.366,35.035 ; 55.466,34.935 55.516,34.885
  Bottom w0.57: 59.603,34.535 59.678,34.535 ; 66.266,30.935 66.316,30.985 66.366,30.985 ; 66.616,31.235 66.616,31.285 66.666,31.335 66.666,31.41
  Bottom w0.575: 59.977,34.535 60.051,34.535 ; 65.439,31.188 65.484,31.137 65.528,31.086 ; 66.197,30.935 66.266,30.935
  Bottom w0.58: v1@55.266,35.135 v1@55.316,35.085 ; 55.516,34.885 55.566,34.835 ; 63.945,33.707 63.996,33.655 ; 65.395,31.238 65.439,31.188
  Bottom w0.585: 65.528,31.086 65.572,31.036 ; 65.616,30.985 65.666,30.985 65.716,30.935 65.785,30.935
  Bottom w0.59: 56.763,34.535 56.837,34.535 ; 66.366,30.985 66.416,31.035 66.466,31.035 ; 66.566,31.135 66.566,31.185 66.616,31.235
  Bottom w0.6: 65.351,31.289 65.395,31.238 ; 66.666,32.082 66.666,32.156
  Bottom w0.605: 56.239,34.535 56.314,34.535 ; 63.893,33.758 63.945,33.707 ; 65.572,31.036 65.616,30.985
  Bottom w0.61: 55.566,34.835 55.616,34.785 ; 59.528,34.535 59.603,34.535
  Bottom w0.62: 60.051,34.535 60.126,34.535
  Bottom w0.625: 63.841,33.81 63.893,33.758 ; 65.307,31.339 65.351,31.289
  Bottom w0.635: 66.666,32.156 66.666,32.231
  Bottom w0.645: 56.837,34.535 56.912,34.535 ; 66.466,31.035 66.516,31.085 66.566,31.135
  Bottom w0.65: 55.616,34.785 55.666,34.735
  Bottom w0.655: 63.789,33.862 63.841,33.81
  Bottom w0.665: 56.165,34.535 56.239,34.535 ; 66.666,32.231 66.666,32.305
  Bottom w0.67: 59.453,34.535 59.528,34.535
  Bottom w0.68: 60.126,34.535 60.201,34.535
  Bottom w0.69: 63.737,33.914 63.789,33.862
  Bottom w0.705: 55.666,34.735 55.716,34.685
  Bottom w0.71: 66.666,32.305 66.666,32.38
  Bottom w0.715: 56.912,34.535 56.987,34.535
  Bottom w0.725: 63.686,33.966 63.737,33.914
  Bottom w0.74: 56.09,34.535 56.165,34.535 ; 59.379,34.535 59.453,34.535 ; 66.666,32.38 66.666,32.455
  Bottom w0.75: 60.201,34.535 60.276,34.535
  Bottom w0.76: 63.634,34.017 63.686,33.966
  Bottom w0.77: 55.716,34.685 55.766,34.635
  Bottom w0.775: 66.666,32.455 66.666,32.529
  Bottom w0.795: 56.987,34.535 57.062,34.535 ; 63.582,34.069 63.634,34.017
  Bottom w0.8: 55.766,34.635 55.816,34.585 55.866,34.535 55.94,34.535 56.015,34.535 56.09,34.535 ; 57.062,34.535 57.136,34.535 57.211,34.535 57.286,34.535 57.361,34.535 57.435,34.535 57.51,34.535 57.585,34.535 57.66,34.535 57.734,34.535 57.809,34.535 57.884,34.535 57.959,34.535 58.033,34.535 58.108,34.535 58.183,34.535 58.258,34.535 58.332,34.535 58.407,34.535 58.482,34.535 58.556,34.535 58.631,34.535 58.706,34.535 58.781,34.535 58.855,34.535 58.93,34.535 59.005,34.535 59.08,34.535 59.154,34.535 59.229,34.535 59.304,34.535 59.379,34.535 ; 60.276,34.535 60.35,34.535 60.425,34.535 60.5,34.535 60.575,34.535 60.649,34.535 60.724,34.535 60.799,34.535 60.873,34.535 60.948,34.535 61.023,34.535 61.098,34.535 61.172,34.535 61.247,34.535 61.322,34.535 61.397,34.535 61.471,34.535 61.546,34.535 61.621,34.535 61.696,34.535 61.77,34.535 61.845,34.535 61.92,34.535 61.995,34.535 62.069,34.535 62.144,34.535 62.219,34.535 62.294,34.535 62.368,34.535 62.443,34.535 62.518,34.535 62.593,34.535 62.667,34.535 62.742,34.535 62.817,34.535 62.892,34.535 62.966,34.535 63.041,34.535 63.116,34.535 63.168,34.483 63.219,34.432 63.271,34.38 63.323,34.328 63.375,34.276 63.427,34.224 63.478,34.173 63.53,34.121 63.582,34.069 ; J1.4@63.55,44.91 63.589,44.868 63.627,44.827 63.666,44.785 63.718,44.733 63.77,44.681 63.822,44.629 63.874,44.577 63.926,44.525 63.978,44.473 64.03,44.421 64.082,44.368 64.134,44.316 64.187,44.264 64.239,44.212 64.291,44.16 64.343,44.108 64.395,44.056 64.447,44.004 64.499,43.952 64.551,43.9 64.603,43.848 64.655,43.796 64.707,43.743 64.759,43.691 64.812,43.639 64.864,43.587 64.916,43.535 64.969,43.482 65.022,43.429 65.075,43.376 65.128,43.323 65.181,43.27 65.234,43.217 65.287,43.164 65.34,43.111 65.393,43.058 65.446,43.005 65.499,42.952 65.552,42.899 65.605,42.846 65.658,42.793 65.711,42.74 65.764,42.687 65.817,42.634 65.87,42.581 65.923,42.528 65.976,42.475 66.029,42.421 66.082,42.368 66.135,42.315 66.188,42.262 66.242,42.209 66.295,42.156 66.348,42.103 66.401,42.05 66.454,41.997 66.507,41.944 66.56,41.891 66.613,41.838 66.666,41.785 66.666,41.71 66.666,41.636 66.666,41.561 66.666,41.487 66.666,41.412 66.666,41.337 66.666,41.263 66.666,41.188 66.666,41.113 66.666,41.039 66.666,40.964 66.666,40.889 66.666,40.815 66.666,40.74 66.666,40.665 66.666,40.591 66.666,40.516 66.666,40.442 66.666,40.367 66.666,40.292 66.666,40.218 66.666,40.143 66.666,40.068 66.666,39.994 66.666,39.919 66.666,39.844 66.666,39.77 66.666,39.695 66.666,39.62 66.666,39.546 66.666,39.471 66.666,39.397 66.666,39.322 66.666,39.247 66.666,39.173 66.666,39.098 66.666,39.023 66.666,38.949 66.666,38.874 66.666,38.799 66.666,38.725 66.666,38.65 66.666,38.575 66.666,38.501 66.666,38.426 66.666,38.352 66.666,38.277 66.666,38.202 66.666,38.128 66.666,38.053 66.666,37.978 66.666,37.904 66.666,37.829 66.666,37.754 66.666,37.68 66.666,37.605 66.666,37.53 66.666,37.456 66.666,37.381 66.666,37.307 66.666,37.232 66.666,37.157 66.666,37.083 66.666,37.008 66.666,36.933 66.666,36.859 66.666,36.784 66.666,36.709 66.666,36.635 66.666,36.56 66.666,36.485 66.666,36.411 66.666,36.336 66.666,36.262 66.666,36.187 66.666,36.112 66.666,36.038 66.666,35.963 66.666,35.888 66.666,35.814 66.666,35.739 66.666,35.664 66.666,35.59 66.666,35.515 66.666,35.44 66.666,35.366 66.666,35.291 66.666,35.217 66.666,35.142 66.666,35.067 66.666,34.993 66.666,34.918 66.666,34.843 66.666,34.769 66.666,34.694 66.666,34.619 66.666,34.545 66.666,34.47 66.666,34.395 66.666,34.321 66.666,34.246 66.666,34.172 66.666,34.097 66.666,34.022 66.666,33.948 66.666,33.873 66.666,33.798 66.666,33.724 66.666,33.649 66.666,33.574 66.666,33.5 66.666,33.425 66.666,33.35 66.666,33.276 66.666,33.201 66.666,33.127 66.666,33.052 66.666,32.977 66.666,32.903 66.666,32.828 66.666,32.753 66.666,32.679 66.666,32.604 66.666,32.529
MOTOR_B_PLUS: DRIVER.10 R_PHASE_B.1 U_CURRENT_B.8 | length 30
  Top w0.15: U_CURRENT_B.8@51.345,44.155 R_PHASE_B.1@52.571,42.06
  Top w0.48: DRIVER.10@53.766,36.485 v1(54.966,36.485)
  Top w0.545: DRIVER.10@53.716,36.435 DRIVER.10@53.766,36.485
  Top w0.6: R_PHASE_B.1@52.571,42.06 52.666,41.985 v1(53.566,41.985)
  Bottom w0.5: 58.466,41.985 58.516,41.935 59.016,41.935 59.066,41.885 62.05,41.91 64.25,41.91
  Bottom w0.525: 64.441,38.185 64.441,38.235 64.571,38.335
  Bottom w0.53: 64.671,38.585 64.671,40.285
  Bottom w0.535: v1(53.566,41.985) 54.566,41.985 ; 64.666,41.545 64.666,41.495 64.716,41.445
  Bottom w0.54: 54.566,41.985 58.466,41.985
  Bottom w0.55: 64.25,41.91 64.666,41.545
  Bottom w0.555: 64.821,40.535 64.821,40.635 64.871,40.685 ; 64.821,41.285 64.821,41.185 64.871,41.135
  Bottom w0.56: 64.621,38.435 64.621,38.535 64.671,38.585 ; 64.716,41.445 64.771,41.335 64.821,41.285 ; 64.771,40.435 64.771,40.485 64.821,40.535
  Bottom w0.565: 63.966,37.735 64.441,38.185 ; 64.721,40.335 64.721,40.385 64.771,40.435
  Bottom w0.58: 64.871,40.685 64.871,41.135
  Bottom w0.585: 64.571,38.335 64.571,38.385 64.621,38.435
  Bottom w0.59: 63.916,37.735 63.966,37.735 ; 64.671,40.285 64.721,40.335
  Bottom w0.6: v1(54.966,36.485) 55.616,37.135 55.916,37.435 58.85,37.435 59.15,37.735 60.25,37.735 60.55,37.435 63.616,37.435 63.916,37.735
MOTOR_REVERSE_BLOCK: D_MOTOR_BLOCK.2 F_MOTOR_VBUS.2 | length 9.4
  Top w0.3: v1(40.85,51.798) 40.85,50.948 40.9,50.898 D_MOTOR_BLOCK.2@40.992,50.81 ; F_MOTOR_VBUS.2@46.15,53.648 46.6,54.098 46.9,54.098 47,54.198 F_MOTOR_VBUS.2@47.3,54.198
  Top w0.6: v1(45.7,53.198) F_MOTOR_VBUS.2@46.15,53.648
  Bottom w0.3: v1(40.85,51.798) 40.85,51.998 40.9,52.048
  Bottom w0.6: 40.9,52.048 41.1,52.248 41.15,52.248 41.55,52.648 41.6,52.648 41.7,52.748 41.8,52.748 41.85,52.798 42.05,52.798 42.1,52.848 42.15,52.848 42.25,52.948 43.15,52.948 43.65,53.448 44,53.448 44.7,54.148 44.75,54.148 v1(45.7,53.198)
MOTOR_VBUS_JOIN: F_MOTOR_VBUS.1 J_MOTOR_USB.6 J_MOTOR_USB.15 R_PD_VBUS.1 R_PD_VDD.1 TP_PD.1 | length 58.7
  Top w0.15: R_PD_VBUS.1@31.54,46.46 31.54,47.96 31.09,48.41 31.09,48.46 31.04,48.51 31.04,48.96 31.24,49.16 31.29,49.16 31.39,49.26 31.49,49.26 v1(32.19,49.96) ; F_MOTOR_VBUS.1@47.3,49.923 47.39,50.01 47.74,50.36 v1(47.725,50.86)
  Top w0.3: 40.65,57.81 39.8,58.66 TP_PD.1@39.8,58.81 40.9,58.81 41,58.71 41.05,58.71 ; R_PD_VDD.1@46.2,61.66 46.95,62.41 R_PD_VDD.1@47.05,62.098 ; 46.45,50.81 46.45,50.76 47.2,50.01 F_MOTOR_VBUS.1@47.3,49.923
  Top w0.305: 51.15,61.086 51.35,61.96 ; 51.15,61.731 51.35,61.96 ; 51.35,62.76 51.35,61.96 ; 51.55,62.36 51.35,61.96 ; 55.75,62.16 55.75,61.96 55.95,61.697
  Top w0.39: 55.294,62.352 55.75,62.16
  Top w0.4: 51.15,63.16 51.35,62.76 ; 51.55,62.36 51.772,62.352
  Top w0.5: 51.15,61.086 51.15,61.731
  Top w0.55: 50.45,63.26 51.15,63.16 ; 55.95,61.086 55.95,61.697
  Top w0.6: 40.65,57.81 v1(41.3,57.16) ; 46.45,50.81 v1(46.45,51.81)
  Top w0.62: 51.772,62.352 53.074,62.891 ; 54.775,63.01 55.294,62.352
  Top w0.67: 49.025,63.385 49.75,63.36 50.45,63.26
  Top w0.725: 48.3,63.41 49.025,63.385
  Top w0.8: 41.05,58.71 41.5,58.71 v1(41.65,58.56) ; v1(45.95,61.01) 46.15,61.61 R_PD_VDD.1@46.2,61.66 ; R_PD_VDD.1@47.05,62.098 47.05,62.407 47.502,61.955 47.926,62.558 48.3,63.41 ; 53.074,62.891 53.725,63.01 54.775,63.01
  Bottom w0.15: v1(32.19,49.96) 34.39,49.96 34.89,50.46 34.94,50.46 34.99,50.51 35.04,50.51 35.09,50.56 38.09,50.56 38.34,50.81 38.44,50.81 38.49,50.86 v1(47.725,50.86)
  Bottom w0.6: v1(41.3,57.16) 43.55,54.91 44.8,54.91 44.85,54.86 45.05,54.86 45.1,54.81 45.15,54.81 46.35,53.61 46.35,53.56 46.4,53.51 46.4,53.41 46.45,53.36 v1(46.45,51.81)
  Bottom w0.8: v1(41.65,58.56) 43.5,58.56 44.9,59.96 45.2,59.96 45.25,60.01 45.3,60.01 45.35,60.06 45.4,60.06 45.45,60.11 45.5,60.11 45.6,60.21 45.65,60.21 45.7,60.26 45.7,60.31 45.8,60.41 45.8,60.46 45.85,60.51 45.85,60.56 45.9,60.61 45.9,60.66 45.95,60.71 v1(45.95,61.01)
PD_CC1: J_MOTOR_USB.8 U_PD.7 | length 11.4
  Top w0.15: U_PD.7@52.55,52.56 52.65,52.636 53.05,53.036 53.05,53.386 53.1,53.436 53.1,53.486 53.15,53.536 53.55,53.536 54.3,54.286 55.3,54.286 55.4,54.386 55.4,55.636 56.05,56.286 56.05,59.436 55.55,59.936 55.35,59.936 55.15,60.136 54.9,60.386 54.9,60.686 54.8,60.786 J_MOTOR_USB.8@54.8,61.086
PD_CC2: J_MOTOR_USB.14 U_PD.6 | length 9.4
  Top w0.15: v1(51.1,55.086) 51.1,53.436 51.1,52.986 51.45,52.636 U_PD.6@51.55,52.56 ; v1(51.1,56.686) 50.75,57.036 50.75,59.536 50.8,59.586 50.8,59.636 51.15,59.986 51.2,59.986 51.25,60.036 51.3,60.036 51.4,60.136 51.45,60.136 51.7,60.386 51.7,60.686 51.8,60.786 J_MOTOR_USB.14@51.8,61.086
  Mid2 w0.15: v1(51.1,55.086) v1(51.1,56.686)
PD_CFG1_CONTROL: Q_PD_CFG1.1 U1.6 | length 17.3
  Top w0.15: v1(32.65,40.46) 33.3,41.11 33.3,41.61 33.35,41.66 33.35,41.71 33.45,41.81 33.85,41.81 33.9,41.86 33.95,41.86 U1.6@34,41.91 ; v1(37.2,28.46) 38.2,28.46 Q_PD_CFG1.1@38.3,28.56
  Bottom w0.15: v1(32.65,40.46) 32.65,40.41 32.75,40.31 32.75,34.11 37.2,29.66 v1(37.2,28.46)
PD_CFG1_OUTPUT: Q_PD_CFG1.3 R_PD_CFG1_PU.1 U_PD.9 | length 82.4
  Top w0.1: 36.95,28.06 36.8,28.21 36.8,28.26 36.75,28.31 36.75,28.61 36.8,28.66 36.8,28.71 37,28.91 Q_PD_CFG1.3@37,29.06 ; 62.2,47.81 62.25,47.86 62.25,48.01 62.7,48.46 R_PD_CFG1_PU.1@62.79,48.56
  Top w0.15: 36.95,28.06 37,28.01 38.1,28.01 v1(38.6,27.51) ; Q_PD_CFG1.3@37,29.06 v1(37.65,29.71) ; v1(43.7,38.61) 43.7,39.26 44.95,40.51 44.95,40.91 45.05,41.01 45.05,41.06 45.1,41.11 45.1,42.56 45.3,42.76 45.3,42.86 45.35,42.91 45.35,43.11 47.8,45.56 47.8,45.61 47.85,45.66 47.85,45.86 47.9,45.91 v1(47.9,46.76) ; U_PD.9@54.55,52.56 54.65,52.66 55.05,53.06 55.05,53.41 v1(55.05,53.66) ; v1(61.5,46.41) 61.5,47.11 62.2,47.81
  Mid1 w0.15: v1(37.65,29.71) 37.75,29.81 38.9,30.96 42.95,30.96 43,31.01 43.05,31.01 43.1,31.06 43.1,31.11 43.2,31.21 43.2,33.16 42.9,33.46 42.9,33.51 42.85,33.56 42.85,33.66 42.8,33.71 42.8,34.51 42.4,34.91 42.4,34.96 42.05,35.31 42.05,35.36 42,35.41 42,36.91 41.75,37.16 41.75,37.31 41.7,37.36 41.7,37.61 42.5,38.41 43.3,38.41 43.35,38.46 43.4,38.46 43.55,38.61 v1(43.7,38.61) ; v1(38.6,27.51) 44.3,27.51 44.35,27.46 51.4,27.46 51.95,26.91 52,26.91 52.05,26.86 52.45,26.86 52.5,26.91 52.55,26.91 52.65,27.01 52.65,27.06 52.7,27.11 52.7,27.46 59.95,34.71 60,34.71 60.05,34.76 60.1,34.76 60.25,34.91 60.25,35.01 60.3,35.06 60.3,35.16 60.55,35.41 60.55,35.46 60.6,35.51 60.6,40.56 60.65,40.61 60.65,44.36 61,44.71 61,44.76 61.05,44.81 61.05,45.96 v1(61.5,46.41)
  Mid2 w0.15: v1(47.9,46.76) 48.75,46.76 50.15,48.16 51.9,48.16 51.95,48.21 52,48.21 52.2,48.41 52.2,49.36 53.7,50.86 53.7,50.91 53.8,51.01 53.8,51.81 53.85,51.86 54.25,52.26 54.25,52.86 54.9,53.51 v1(55.05,53.66)
PD_CFG2_CONTROL: Q_PD_CFG2.1 U1.7 | length 28.6
  Top w0.15: U1.7@34,41.51 34.3,41.51 34.4,41.41 34.75,41.41 34.8,41.36 34.85,41.36 v1(35.05,41.16) ; v1(50.95,27.01) 51.25,27.01 51.5,27.26 Q_PD_CFG2.1@51.6,27.36
  Bottom w0.15: v1(35.05,41.16) 35.65,40.56 35.65,39.01 35.7,38.96 35.7,38.91 38,36.61 38,35.91 38.05,35.86 38.05,35.76 38.1,35.71 38.1,35.66 39.15,34.61 39.15,28.91 39.2,28.86 39.2,28.81 39.25,28.76 39.25,28.71 39.4,28.56 39.45,28.56 39.5,28.51 39.55,28.51 39.6,28.46 43.05,28.46 43.85,27.66 43.95,27.66 44,27.61 45,27.61 45.05,27.56 47,27.56 47.4,27.16 48.6,27.16 48.75,27.01 v1(50.95,27.01)
PD_CFG2_OUTPUT: Q_PD_CFG2.3 R_PD_CFG2_PU.1 U_PD.2 | length 66.4
  Top w0.107: Q_PD_CFG2.3@50.3,27.86 50.3,27.91 v1(50.8,28.41) ; 63.75,47.51 64.7,48.46 R_PD_CFG2_PU.1@64.79,48.56
  Top w0.15: Q_PD_CFG2.3@50.3,27.86 50.3,28.86 50.3,29.46 v1(52.45,31.61) ; U_PD.2@54.55,58.56 54.65,58.66 54.95,58.96 54.95,59.46 v1(54.95,59.71) ; v1(60.6,45.01) 61.25,45.01 63.75,47.51
  Mid1 w0.107: v1(50.8,28.41) 51.35,28.96
  Mid1 w0.15: 51.35,28.96 51.95,29.56 51.95,30.46 52.8,31.31 52.8,31.36 52.85,31.41 52.85,36.61 53.05,36.81 53.05,43.36 53.1,43.41 53.1,43.46 54.25,44.61 54.25,44.66 54.3,44.66 54.35,44.71 54.4,44.71 54.45,44.76 v1(55.75,44.76) ; v1(52.45,31.61) 52.45,32.56 52.55,32.66 52.55,32.71 52.6,32.76 52.6,39.51 52.85,39.76 52.85,39.81 52.9,39.86 52.9,39.96 52.95,40.01 52.95,42.56 v1(53.65,43.26)
  Mid2 w0.15: v1(55.75,44.76) 58.05,44.76 58.1,44.81 58.15,44.81 58.2,44.86 59.75,44.86 59.85,44.96 59.9,44.96 59.95,45.01 v1(60.6,45.01)
  Bottom w0.15: v1(53.65,43.26) 53.65,43.61 54.95,44.91 54.95,44.96 55,45.01 55,52.91 55.45,53.36 55.45,53.41 55.5,53.46 55.5,56.86 55.75,57.11 55.75,57.16 55.8,57.21 55.8,57.31 55.85,57.36 55.85,57.56 55.8,57.61 55.8,57.71 55.4,58.11 55.3,58.21 55.3,59.26 55.3,59.36 v1(54.95,59.71)
PD_CFG3_CONTROL: Q_PD_CFG3.1 U1.8 | length 26.3
  Top w0.15: U1.8@34,41.11 34.3,41.11 34.4,41.01 34.55,41.01 34.65,40.91 34.65,40.86 35.65,39.86 35.65,39.66 35.75,39.56 35.8,39.56 v1(36.15,39.21) ; v1(53.9,27.86) 54.3,27.46 Q_PD_CFG3.1@54.4,27.36
  Bottom w0.15: v1(36.15,39.21) 36.2,39.21 38.75,36.66 38.85,36.66 38.9,36.61 39.85,36.61 39.9,36.56 40.25,36.56 43.3,33.51 43.35,33.51 43.4,33.46 44.05,33.46 46,31.51 46,31.46 46.05,31.41 46.1,31.41 46.15,31.36 47.8,31.36 50,29.16 50.05,29.16 50.15,29.06 50.2,29.06 50.25,29.01 50.3,29.01 50.35,28.96 52.8,28.96 v1(53.9,27.86)